# EAGLE board 2 DC motor control with IR remote PCB (EAGLE 9.7.0)
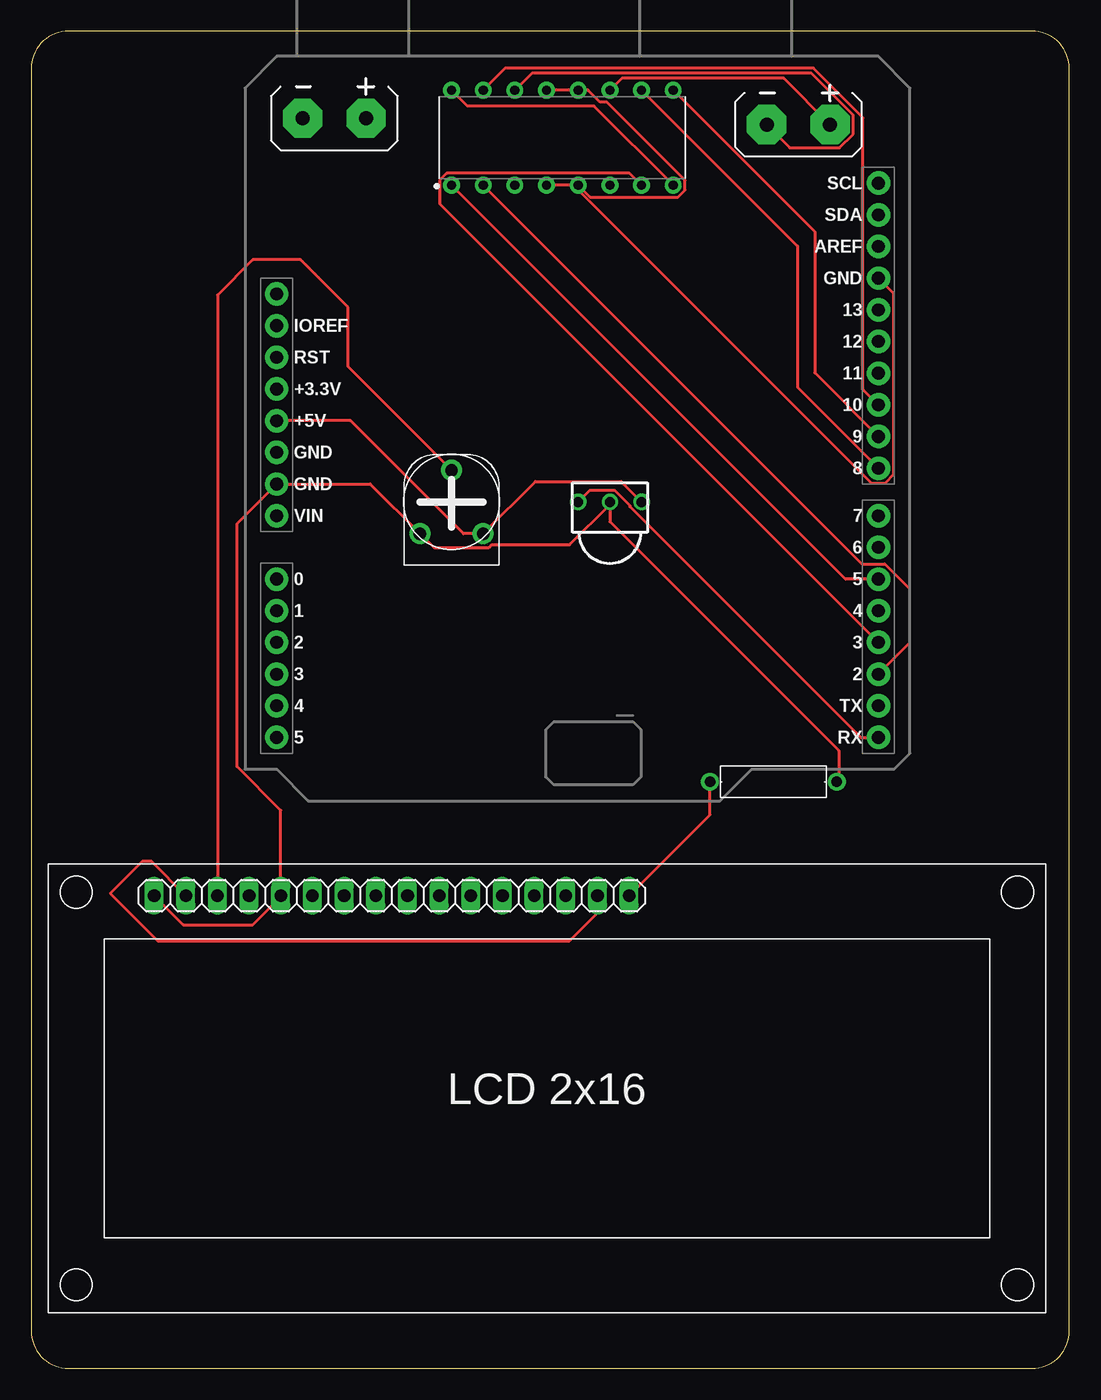
[diagram p0: board, top side]
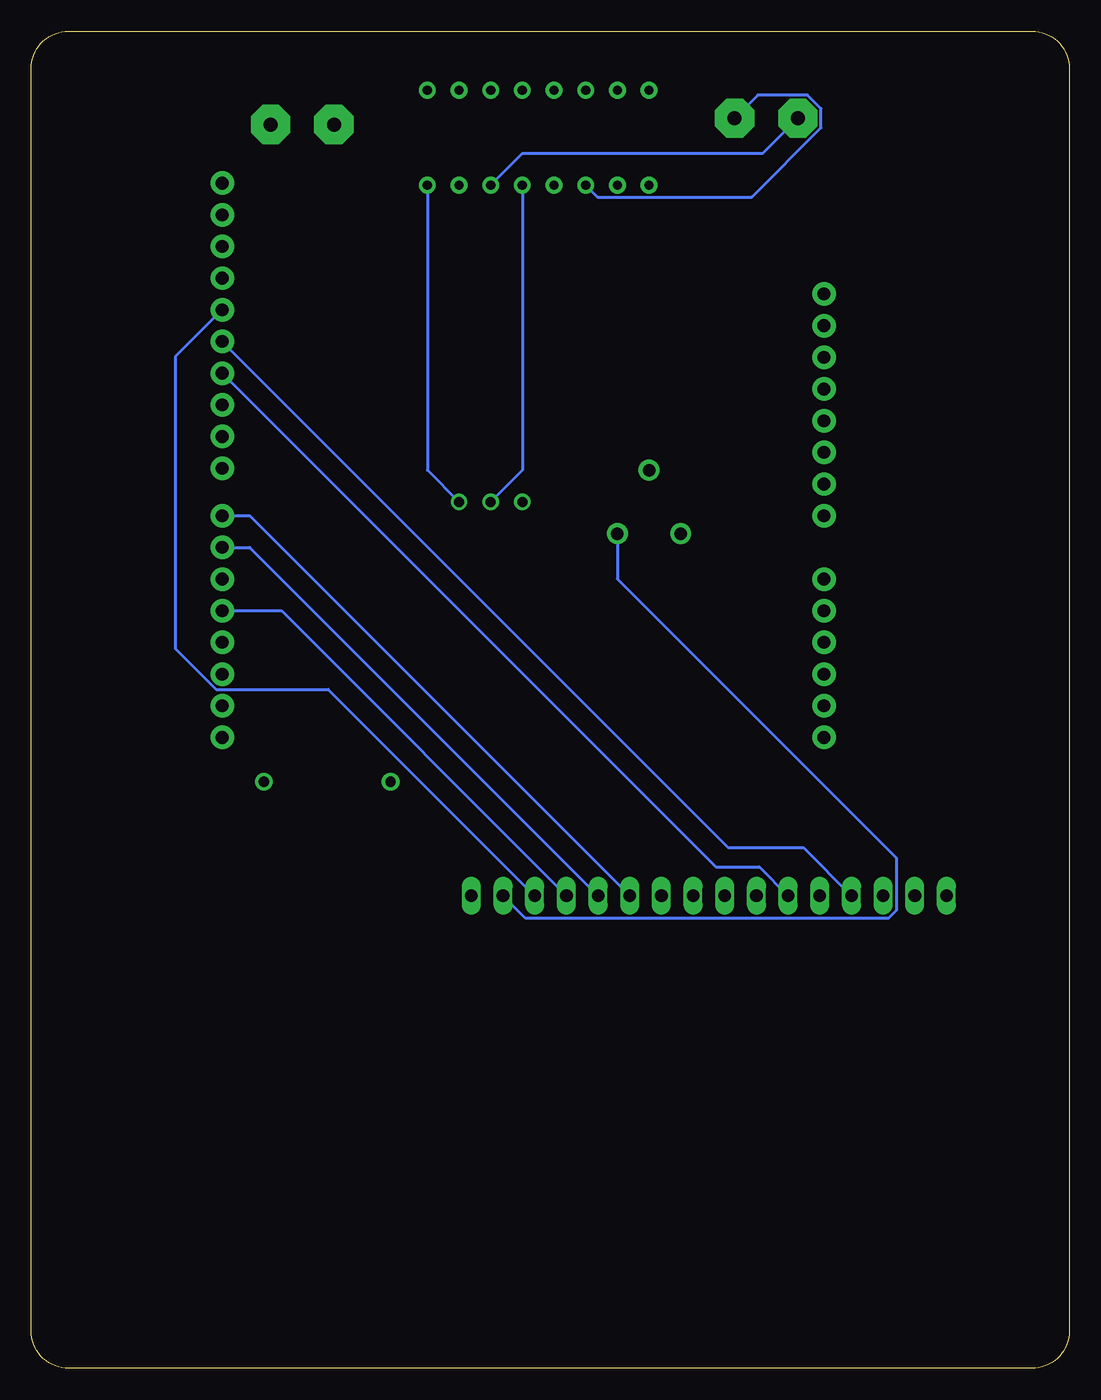
[diagram p1: board, bottom side, seen from below]

Size 83.27 x 107.23 mm. Coordinates in mm from the lower left corner, seen from the top.
Outline: 80.27,0 arc90 83.27,3 83.27,104.23 arc90 80.27,107.23 3,107.23 arc90 0,104.23 0,3 arc90 3,0 80.27,0
Copper layers (1*16): Top 0.035mm / dielectric 1.5mm / Bottom 0.035mm
Design rules "default": minimum track width 6mil, minimum drill 0.35mm, track to track 6mil, track to pad 6mil, pad to pad 6mil, via to via 6mil, smd to smd 6mil, copper to edge 40mil, drill to drill 6mil, minimum pad ring 10mil, minimum via ring 8mil, stop-mask expansion 4mil, vias tented up to drill 0mil, thermal gap 10mil

## Footprints (pad centres in the part's own frame; a part is rotated, then mirrored left to right if it is on the bottom)
MOTOR = drill 1.118 pad 3.15 octagon: + 2.54,0; - -2.54,0
RESAD1016W63L850D250B = drill 0.83 pad 1.43: 1 -5.08,0; 2 5.08,0
HA-06-SM065 = drill 1 pad 1.676: 1 -2.54,-2.54; 2 0,2.54; 3 2.54,-2.54
ARDUINO-UNO-R3-SHIELD = drill 1.016 pad 1.88: 3.3V 24.13,-2.54; 5V 24.13,0; A0 24.13,12.7; A1 24.13,15.24; A2 24.13,17.78; A3 24.13,20.32; A4 24.13,22.86; A5 24.13,25.4; AREF -24.13,-13.97; D2 -24.13,20.32; D3 -24.13,17.78; D4 -24.13,15.24; D5 -24.13,12.7; D6 -24.13,10.16; D7 -24.13,7.62; D8 -24.13,3.81; D9 -24.13,1.27; D10 -24.13,-1.27; D11 -24.13,-3.81; D12 -24.13,-6.35; D13 -24.13,-8.89; GND@0 24.13,2.54; GND@1 24.13,5.08; GND@2 -24.13,-11.43; IOREF 24.13,-7.62; NC 24.13,-10.16; RES 24.13,-5.08; RX -24.13,25.4; SCL -24.13,-19.05; SDA -24.13,-16.51; TX -24.13,22.86; VIN 24.13,7.62
JHD-162A = drill 1.016 long: 1 -19.05,0; 2 -16.51,0; 3 -13.97,0; 4 -11.43,0; 5 -8.89,0; 6 -6.35,0; 7 -3.81,0; 8 -1.27,0; 9 1.27,0; 10 3.81,0; 11 6.35,0; 12 8.89,0; 13 11.43,0; 14 13.97,0; 15 16.51,0; 16 19.05,0
DIP762W53P254L1969H508Q16B = drill 0.743 pad 1.343: 1 -3.81,8.89; 2 -3.81,6.35; 3 -3.81,3.81; 4 -3.81,1.27; 5 -3.81,-1.27; 6 -3.81,-3.81; 7 -3.81,-6.35; 8 -3.81,-8.89; 9 3.81,-8.89; 10 3.81,-6.35; 11 3.81,-3.81; 12 3.81,-1.27; 13 3.81,1.27; 14 3.81,3.81; 15 3.81,6.35; 16 3.81,8.89
TSOP48 = drill 0.8: 1 -2.54,0; 2 0,0; 3 2.54,0

## Placement (x,y rotation side)
M1  MOTOR_HDR  [MOTOR]  24.31,100.24 0 top
M2  MOTOR_HDR  [MOTOR]  61.53,99.74 0 top
R1  1k  [RESAD1016W63L850D250B]  59.52,47.04 180 top
RPOT2  250k  [HA-06-SM065]  33.71,69.48 0 top
U1  ARDUINO-UNO-R3-SHIELD  [ARDUINO-UNO-R3-SHIELD]  43.81,75.99 180 top
U3  LCD-16X2JHD-162A  [JHD-162A]  28.91,37.9 0 top
U4  L293E  [DIP762W53P254L1969H508Q16B]  42.6,98.69 90 top
U5  IR-RECEIVERTSOP48  [TSOP48]  46.41,69.48 0 top

## Library data of the parts
M1 M2 R1 RPOT2 U1 U3-U5 = Tinkercad

## Nets
M1_+: M1.+ U4.3
M1_-: M1.- U4.6
M2_+: M2.+ U4.11
M2_-: M2.- U4.14
U1_5V: RPOT2.3 U1.5V U3.2 U3.15 U4.8 U4.16 U5.3
U1_D2: U1.D2 U4.2
U1_D3: U1.D3 U4.7
U1_D4: U1.D4 U3.13
U1_D5: U1.D5 U4.1
U1_D6: U1.D6 U3.12
U1_D7: U1.D7 U3.11
U1_D8: U1.D8 U4.10
U1_D9: U1.D9 U4.9
U1_D10: U1.D10 U4.15
U1_D11: U1.D11 U3.6
U1_D12: U1.D12 U3.4
U1_D13: U1.D13 U3.14
U1_GND: R1.1 RPOT2.1 U1.GND@1 U1.GND@2 U3.1 U3.5 U4.4 U4.5 U4.12 U4.13 U5.2
U1_RX: U1.RX U5.1
U3_LED-: R1.2 U3.16
U3_VO: RPOT2.2 U3.3

## Tracks (layer width: path | path; a pad name or v marks a point on that pad's centre or on a via)
M1_+
  Bottom 0.254: U4.3 37.84,93.93 25.47,93.93 19.92,99.47 19.92,101.01 21,102.1 25,102.1 M1.+
M1_-
  Bottom 0.254: U4.6 43.86,97.43 24.59,97.43 M1.-
M2_+
  Top 0.254: M2.+ 60.36,103.45 47.36,103.45 U4.11
M2_-
  Top 0.254: M2.- 60.84,97.88 64.84,97.88 65.92,98.97 65.92,100.5 62.57,103.86 40.15,103.86 U4.14
U1_5V
  Top 0.254: U1.5V 25.61,75.99 34.66,66.94 RPOT2.3 40.44,71.12 47.31,71.12 U5.3 | U4.8 45.14,101.23 34.98,101.23 U4.16 | U3.2 9.66,40.64 8.89,40.64 6.35,38.1 10.16,34.29 43.18,34.29 45.42,36.53 U3.15
  Bottom 0.254: RPOT2.3 36.25,63.3 13.9,40.95 13.9,36.7 14.51,36.09 43.62,36.09 U3.15 | U4.8 51.49,72.02 U5.3
U1_D2
  Top 0.254: U4.2 66.62,64.51 68.45,64.51 70.43,62.52 70.43,58.16 U1.D2
U1_D3
  Top 0.254: U4.7 48,95.83 33.32,95.83 32.76,95.27 32.76,93.39 U1.D3
U1_D4
  Bottom 0.254: U1.D4 63.19,60.75 U3.13
U1_D5
  Top 0.254: U1.D5 65.3,63.29 U4.1
U1_D6
  Bottom 0.254: U1.D6 65.73,65.83 U3.12
U1_D7
  Bottom 0.254: U1.D7 65.73,68.37 U3.11
U1_D8
  Top 0.254: U4.10 61.45,90 61.45,78.67 U1.D8
U1_D9
  Top 0.254: U4.9 62.83,91.16 62.83,79.83 U1.D9
U1_D10
  Top 0.254: U1.D10 66.72,78.49 66.72,100.28 62.74,104.26 38.02,104.26 U4.15
U1_D11
  Bottom 0.254: U1.D11 28.36,40.21 24.88,40.21 U3.6
U1_D12
  Bottom 0.254: U1.D12 27.37,41.77 21.35,41.77 U3.4
U1_D13
  Bottom 0.254: U1.D13 71.7,81.12 71.7,57.7 68.45,54.45 59.43,54.45 U3.14
U1_GND
  Top 0.254: U3.1 12.2,35.56 17.78,35.56 20.02,37.8 U3.5 20.02,44.75 16.51,48.26 16.51,67.73 U1.GND@1 27.2,70.91 RPOT2.1 32.29,65.82 36.72,65.82 36.94,66.04 43.18,66.04 46.41,69.27 U5.2 46.41,67.89 64.77,49.53 64.77,47.21 R1.1 | U4.5 44.82,93.93 51.89,93.93 52.44,94.48 52.44,95.27 46.17,101.55 45.62,101.55 44.67,102.5 U4.12 U4.13 | U4.5 U4.4 | U1.GND@2 69.16,86.2 69.16,71.67 68.45,70.96 67.44,70.96 43.87,94.53 U4.5
  Bottom 0.254: U4.5 43.87,72.02 U5.2
U1_RX
  Top 0.254: U5.1 44.81,70.41 46.8,70.41 48.02,69.19 48.02,69.09 66.52,50.59 U1.RX
U3_LED-
  Top 0.254: U3.16 54.44,44.38 R1.2
U3_VO
  Top 0.254: RPOT2.2 25.4,80.33 25.4,85.09 21.59,88.9 17.78,88.9 14.94,86.06 U3.3